# EAGLE board CANBUS Breakout Board X3 (EAGLE 9.6.2)
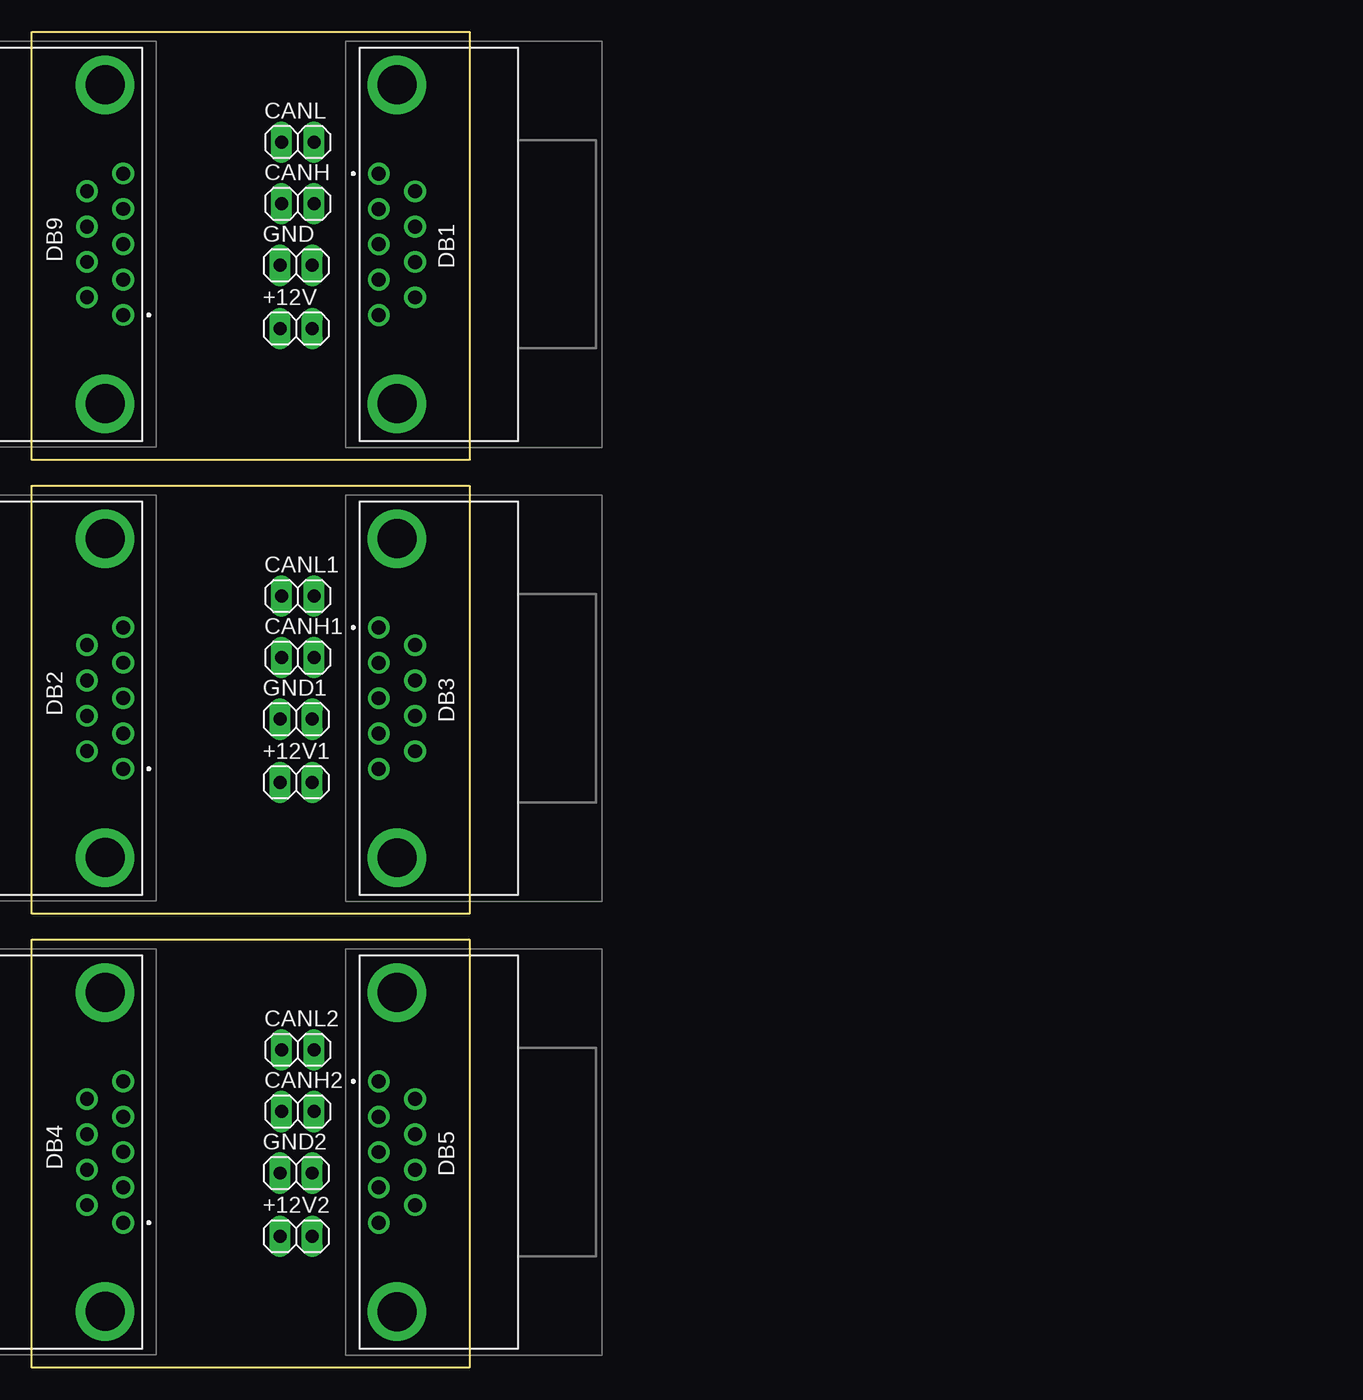
[diagram p0: board, top side]
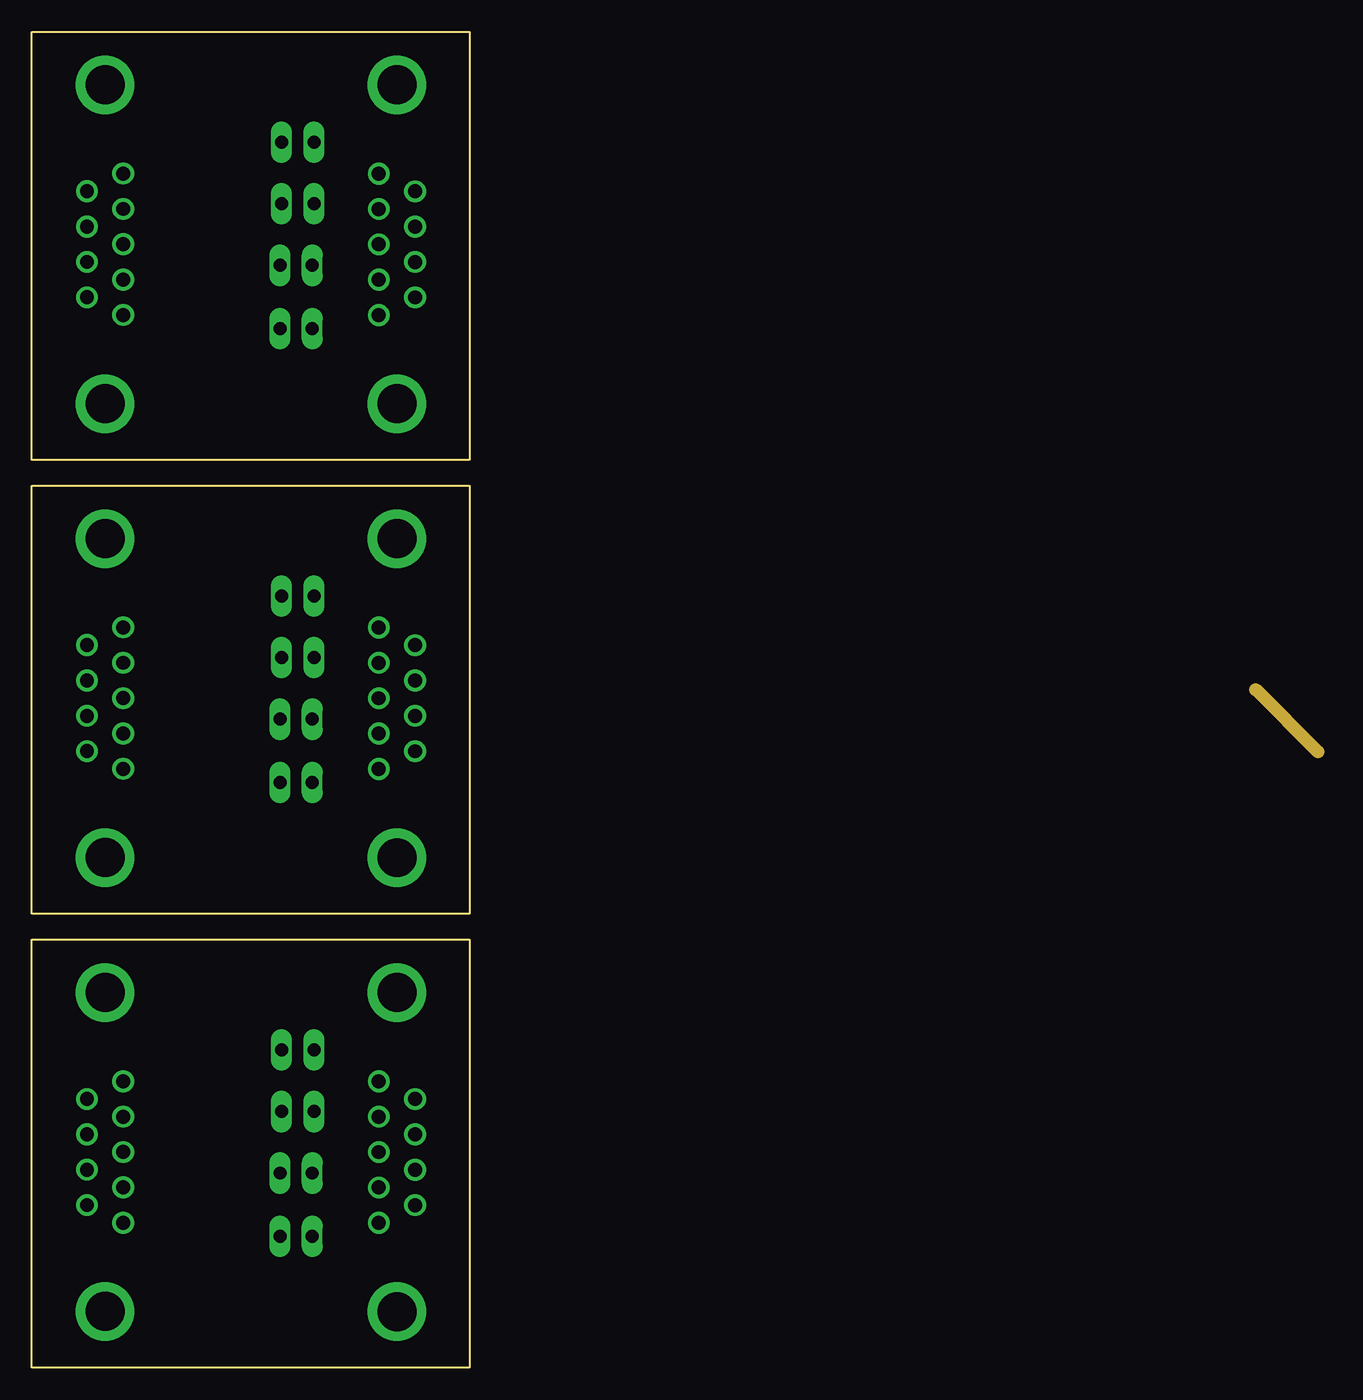
[diagram p1: board, inner layer Route15]
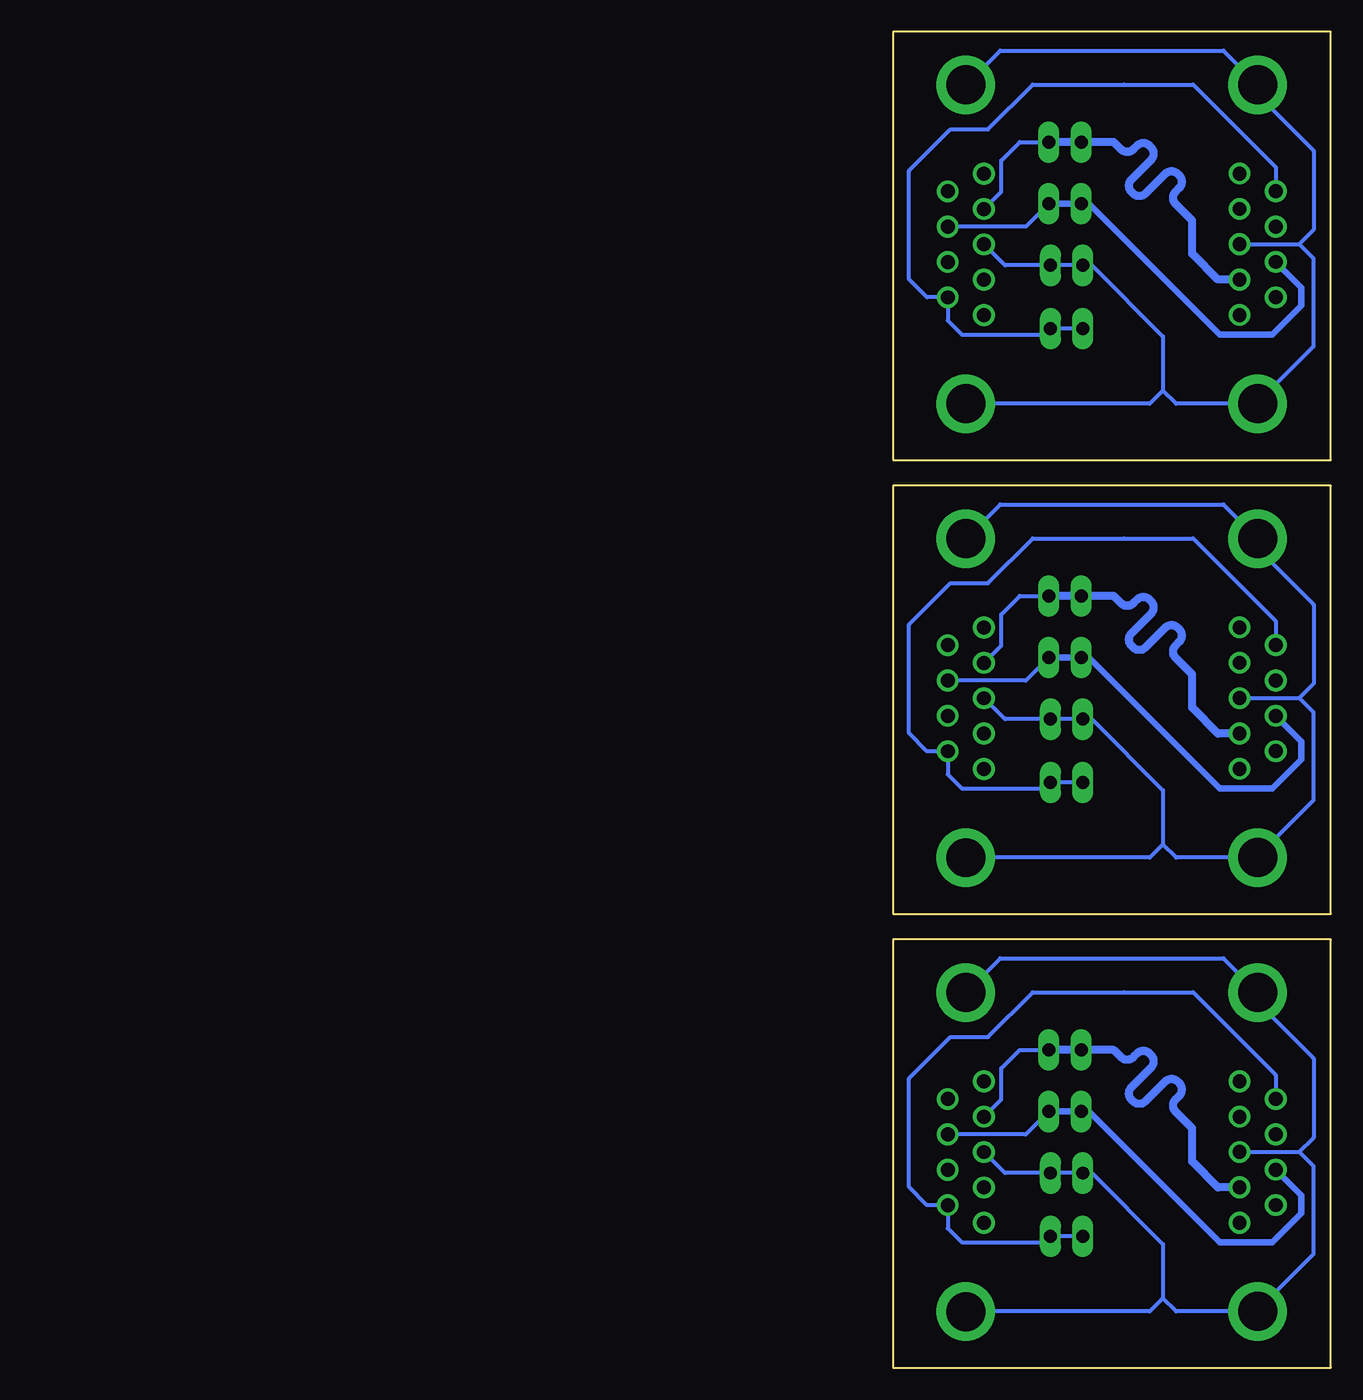
[diagram p2: board, bottom side, seen from below]

Size 34.29 x 104.65 mm. Coordinates in mm from the lower left corner, seen from the top.
Outline: 0,71.12 0,104.65 34.29,104.65 34.29,71.12 0,71.12
Outline: 0,35.56 0,69.09 34.29,69.09 34.29,35.56 0,35.56
Outline: 0,0 0,33.53 34.29,33.53 34.29,0 0,0
Copper layers (1*16): Top 0.035mm / dielectric 1.5mm / Bottom 0.035mm
Design rules "CU_MITS_DesignRules": minimum track width 12mil, minimum drill 23mil, track to track 12mil, track to pad 12mil, pad to pad 12mil, via to via 12mil, smd to smd 0mil, copper to edge 40mil, drill to drill 12mil, minimum pad ring 12mil, minimum via ring 6mil, stop-mask expansion 2mil, vias tented up to drill 100mil, thermal gap 12mil
Net classes: 0 default: drill 0.254 mm, clearance 0.127 mm; 1 pwr: drill 0.254 mm, clearance 0.127 mm; 2 HDMI//SATA: width 0.127 mm, drill 0.254 mm, clearance 0.127 mm; 3 USB: width 0.127 mm, drill 0.254 mm, clearance 0.127 mm

## Footprints (pad centres in the part's own frame; a part is rotated, then mirrored left to right if it is on the bottom)
1X02 = drill 1.016 long: 1 -1.27,0; 2 1.27,0
182009213R531 = drill 1.09 pad 1.635: 1 0,0; 2 -2.77,0; 3 -5.54,0; 4 -8.31,0; 5 -11.08,0; 6 -1.385,-2.84; 7 -4.155,-2.84; 8 -6.925,-2.84; 9 -9.695,-2.84 | drill 3.05 pad 4.575: MH1 6.955,-1.42; MH2 -18.035,-1.42

## Placement (x,y rotation side)
+12V  [1X02]  20.7,81.41 0 top
+12V1  [1X02]  20.7,45.85 0 top
+12V2  [1X02]  20.7,10.29 0 top
CANH  [1X02]  20.83,91.19 0 top
CANH1  [1X02]  20.83,55.63 0 top
CANH2  [1X02]  20.83,20.07 0 top
CANL  [1X02]  20.83,96.01 0 top
CANL1  [1X02]  20.83,60.45 0 top
CANL2  [1X02]  20.83,24.89 0 top
DB1  182-009-213R531  [182009213R531]  27.18,93.54 90 top
DB2  182-009-213R531  [182009213R531]  7.15,46.91 270 top
DB3  182-009-213R531  [182009213R531]  27.18,57.98 90 top
DB4  182-009-213R531  [182009213R531]  7.15,11.35 270 top
DB5  182-009-213R531  [182009213R531]  27.18,22.42 90 top
DB9  182-009-213R531  [182009213R531]  7.15,82.47 270 top
GND  [1X02]  20.7,86.36 0 top
GND1  [1X02]  20.7,50.8 0 top
GND2  [1X02]  20.7,15.24 0 top

## Library data of the parts
+12V +12V1 +12V2 CANH CANH1 CANH2 CANL CANL1 CANL2 GND GND1 GND2 = pinhead
DB1-DB5 DB9 = 182-009-213R531; DESCRIPTION: Norcomp 9 Way Right Angle PCB D-sub Connector Socket, 2.77mm Pitch, with 4-40 Flush Insert/Board Lock; HEIGHT: 12.55mm; MANUFACTURER_NAME: NorComp; MANUFACTURER_PART_NUMBER: 182-009-213R531; MOUSER_PART_NUMBER: 636-182-009-213R531; MOUSER_PRICE-STOCK: https://www.mouser.com/Search/Refine.aspx?Keyword=636-182-009-213R531; RS_PART_NUMBER: 1748825; RS_PRICE-STOCK: http://uk.rs-online.com/web/p/products/1748825

## Nets
+12V: +12V.1 +12V.2 DB1.9 DB9.9
+12V1: +12V1.1 +12V1.2 DB2.9 DB3.9
+12V2: +12V2.1 +12V2.2 DB4.9 DB5.9
CANH: CANH.1 CANH.2 DB1.7 DB9.7
CANH1: CANH1.1 CANH1.2 DB2.7 DB3.7
CANH2: CANH2.1 CANH2.2 DB4.7 DB5.7
CANL: CANL.1 CANL.2 DB1.2 DB9.2
CANL1: CANL1.1 CANL1.2 DB2.2 DB3.2
CANL2: CANL2.1 CANL2.2 DB4.2 DB5.2
GND [pwr]: DB1.3 DB1.MH1 DB1.MH2 DB9.3 DB9.MH1 DB9.MH2 GND.1 GND.2
GND1 [pwr]: DB2.3 DB2.MH1 DB2.MH2 DB3.3 DB3.MH1 DB3.MH2 GND1.1 GND1.2
GND2 [pwr]: DB4.3 DB4.MH1 DB4.MH2 DB5.3 DB5.MH1 DB5.MH2 GND2.1 GND2.2

## Tracks (layer width: path | path; a pad name or v marks a point on that pad's centre or on a via)
+5V1
  Route15 1.016: 100.75,48.24 95.87,53.12
+12V
  Bottom 0.305: +12V.1 +12V.2 22.46,80.92 28.9,80.92 30.02,82.03 DB1.9 31.63,83.85 33.05,85.26 33.05,93.77 29.79,97.02 26.86,97.02 23.36,100.52 16.2,100.52 | DB9.9 4.31,94.05 10.78,100.52 16.2,100.52 | 16.2,100.52
+12V1
  Bottom 0.305: +12V1.1 +12V1.2 22.46,45.36 28.9,45.36 30.02,46.47 DB3.9 31.63,48.29 33.05,49.7 33.05,58.21 29.79,61.46 26.86,61.46 23.36,64.96 16.2,64.96 | DB2.9 4.31,58.49 10.78,64.96 16.2,64.96 | 16.2,64.96
+12V2
  Bottom 0.305: +12V2.1 +12V2.2 22.46,9.8 28.9,9.8 30.02,10.91 DB5.9 31.63,12.73 33.05,14.14 33.05,22.65 29.79,25.9 26.86,25.9 23.36,29.4 16.2,29.4 | DB4.9 4.31,22.93 10.78,29.4 16.2,29.4 | 16.2,29.4
CANH
  Bottom 0.305: DB1.7 23.89,89.39 CANH.2
  Bottom 0.508: DB9.7 2.3,84.61 2.3,83.19 4.58,80.92 8.7,80.92 18.97,91.19 CANH.1 CANH.2
CANH1
  Bottom 0.305: DB3.7 23.89,53.83 CANH1.2
  Bottom 0.508: DB2.7 2.3,49.05 2.3,47.63 4.58,45.36 8.7,45.36 18.97,55.63 CANH1.1 CANH1.2
CANH2
  Bottom 0.305: DB5.7 23.89,18.27 CANH2.2
  Bottom 0.508: DB4.7 2.3,13.49 2.3,12.07 4.58,9.8 8.7,9.8 18.97,20.07 CANH2.1 CANH2.2
CANL
  Bottom 0.305: DB1.2 25.83,92.13 25.83,94.56 24.38,96.01 CANL.2
  Bottom 0.61: DB9.2 8.84,85.24 10.87,87.26 10.87,89.88 12.16,91.17 arc90 12.16,92.14 11.87,92.43 arc-90 11.87,93.4 12,93.53 arc-90 12.97,93.53 14.52,91.98 arc90 15.49,91.98 15.62,92.12 arc90 15.62,93.09 14.08,94.63 arc-90 14.08,95.6 14.21,95.73 arc-90 15.18,95.73 15.47,95.45 arc90 16.44,95.45 17,96.01 CANL.1 CANL.2 22.19,96.01
CANL1
  Bottom 0.305: DB3.2 25.83,56.57 25.83,59 24.38,60.45 CANL1.2
  Bottom 0.61: DB2.2 8.84,49.68 10.87,51.7 10.87,54.32 12.16,55.61 arc90 12.16,56.58 11.87,56.87 arc-90 11.87,57.84 12,57.97 arc-90 12.97,57.97 14.52,56.42 arc90 15.49,56.42 15.62,56.56 arc90 15.62,57.53 14.08,59.07 arc-90 14.08,60.04 14.21,60.17 arc-90 15.18,60.17 15.47,59.89 arc90 16.44,59.89 17,60.45 CANL1.1 CANL1.2 22.19,60.45
CANL2
  Bottom 0.305: DB5.2 25.83,21.01 25.83,23.44 24.38,24.89 CANL2.2
  Bottom 0.61: DB4.2 8.84,14.12 10.87,16.14 10.87,18.76 12.16,20.05 arc90 12.16,21.02 11.87,21.31 arc-90 11.87,22.28 12,22.41 arc-90 12.97,22.41 14.52,20.86 arc90 15.49,20.86 15.62,21 arc90 15.62,21.97 14.08,23.51 arc-90 14.08,24.48 14.21,24.61 arc-90 15.18,24.61 15.47,24.33 arc90 16.44,24.33 17,24.89 CANL2.1 CANL2.2 22.19,24.89
GND
  Bottom 0.305: 1.35,80.16 1.36,80.17 | DB1.MH1 25.91,103.19 8.42,103.19 DB9.MH2 5.73,99.72 1.34,95.33 1.34,89.14 2.47,88.01 | DB1.MH2 14.2,75.52 13.16,76.56 | 13.16,76.56 13.16,80.78 18.73,86.36 GND.1 GND.2 25.53,86.36 DB1.3 | DB9.3 2.47,88.01 | 1.35,80.16 1.35,80.02 5.73,75.64 DB9.MH1 12.11,75.52 13.16,76.56 | 1.35,80.16 1.35,86.9 2.47,88.01
  cutout Bottom: -5.08,-2.42 -5.08,106.68 40.2,106.68 40.2,-2.42
GND1
  Bottom 0.305: 1.35,44.6 1.36,44.61 | DB3.MH1 25.91,67.63 8.42,67.63 DB2.MH2 5.73,64.16 1.34,59.77 1.34,53.58 2.47,52.45 | DB3.MH2 14.2,39.96 13.16,41 | 13.16,41 13.16,45.22 18.73,50.8 GND1.1 GND1.2 25.53,50.8 DB3.3 | DB2.3 2.47,52.45 | 1.35,44.6 1.35,44.46 5.73,40.08 DB2.MH1 12.11,39.96 13.16,41 | 1.35,44.6 1.35,51.34 2.47,52.45
GND2
  Bottom 0.305: 1.35,9.04 1.36,9.05 | DB5.MH1 25.91,32.07 8.42,32.07 DB4.MH2 5.73,28.6 1.34,24.21 1.34,18.02 2.47,16.89 | DB5.MH2 14.2,4.4 13.16,5.44 | 13.16,5.44 13.16,9.66 18.73,15.24 GND2.1 GND2.2 25.53,15.24 DB5.3 | DB4.3 2.47,16.89 | 1.35,9.04 1.35,8.9 5.73,4.52 DB4.MH1 12.11,4.4 13.16,5.44 | 1.35,9.04 1.35,15.78 2.47,16.89